# EAGLE board headstage-neuropix_via-reduce (EAGLE 8.3.2), part 1 of 2
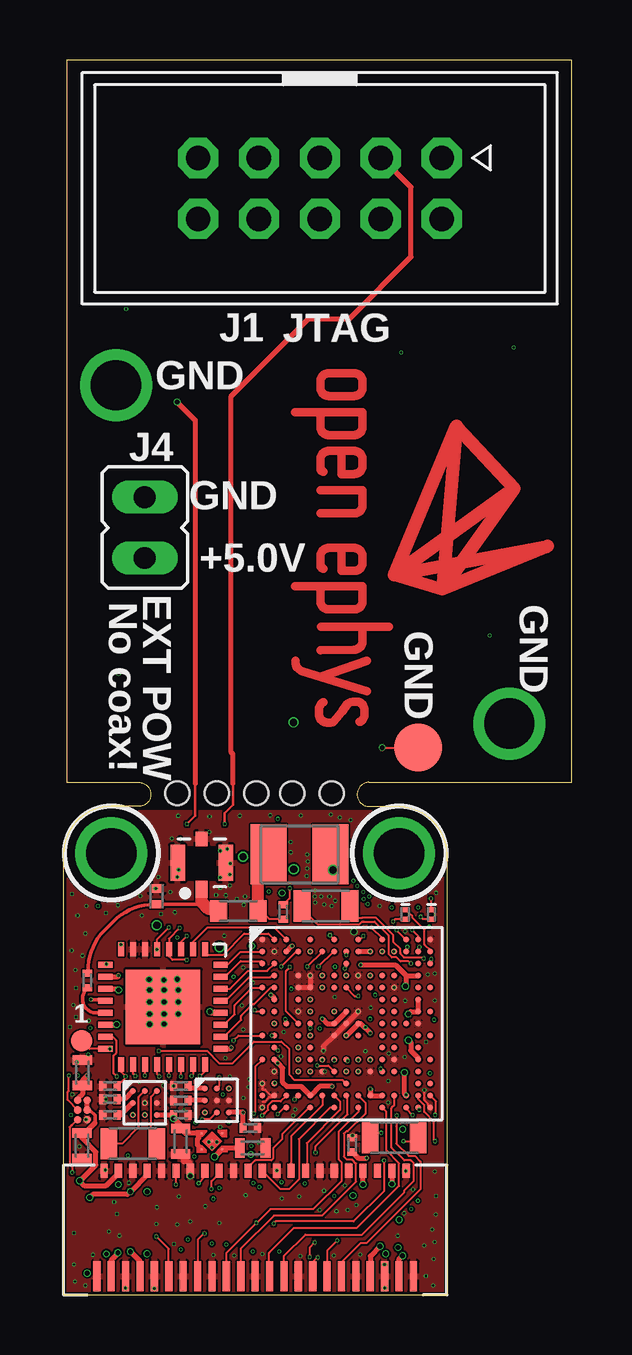
[diagram p0: board, top side]
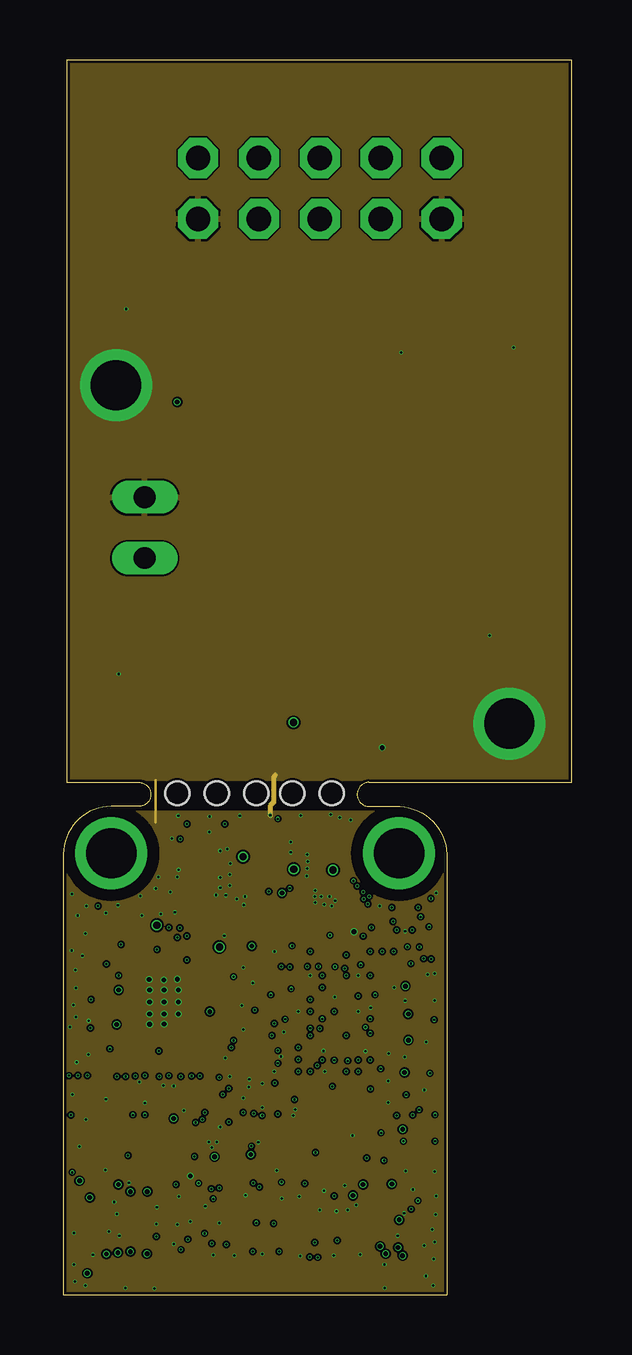
[diagram p1: board, inner layer GND1]
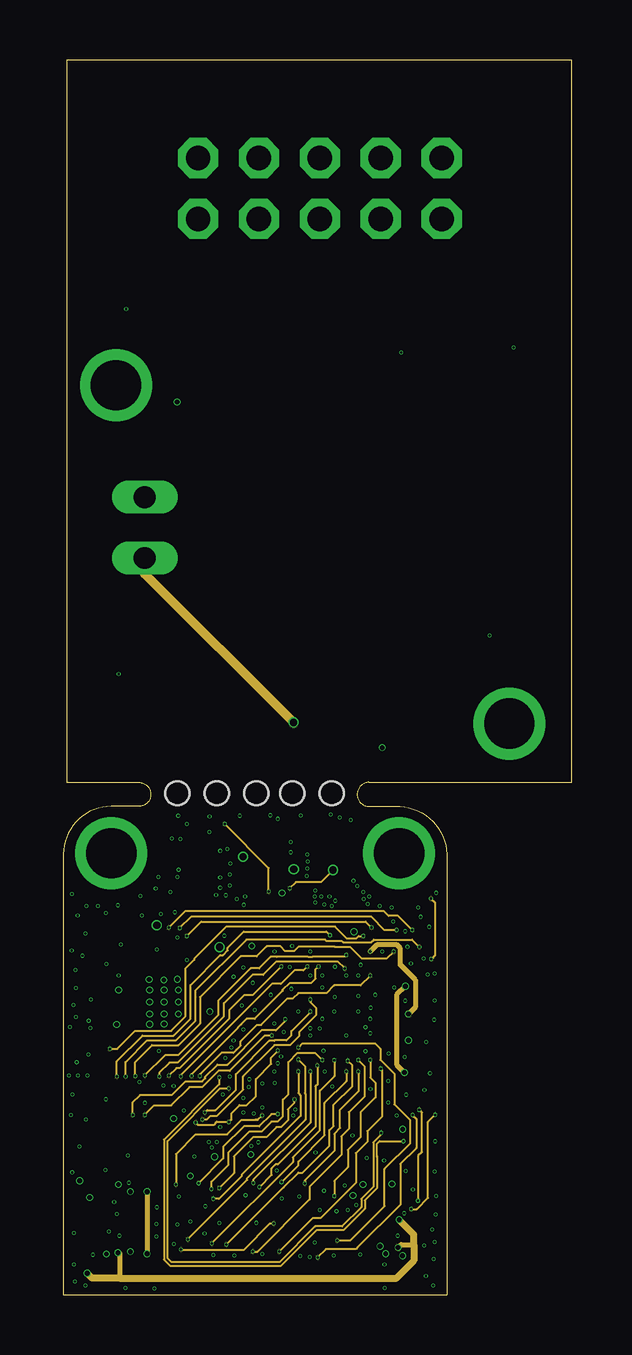
[diagram p2: board, inner layer Highspeed2]
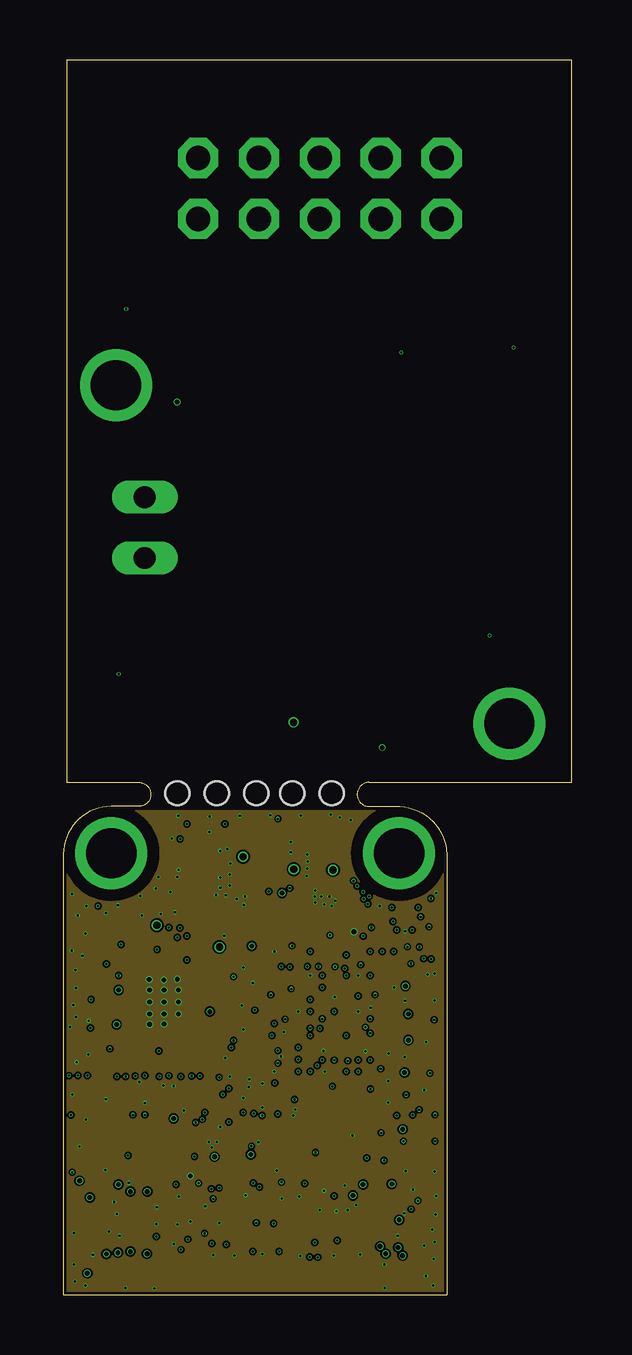
[diagram p3: board, inner layer GND2]
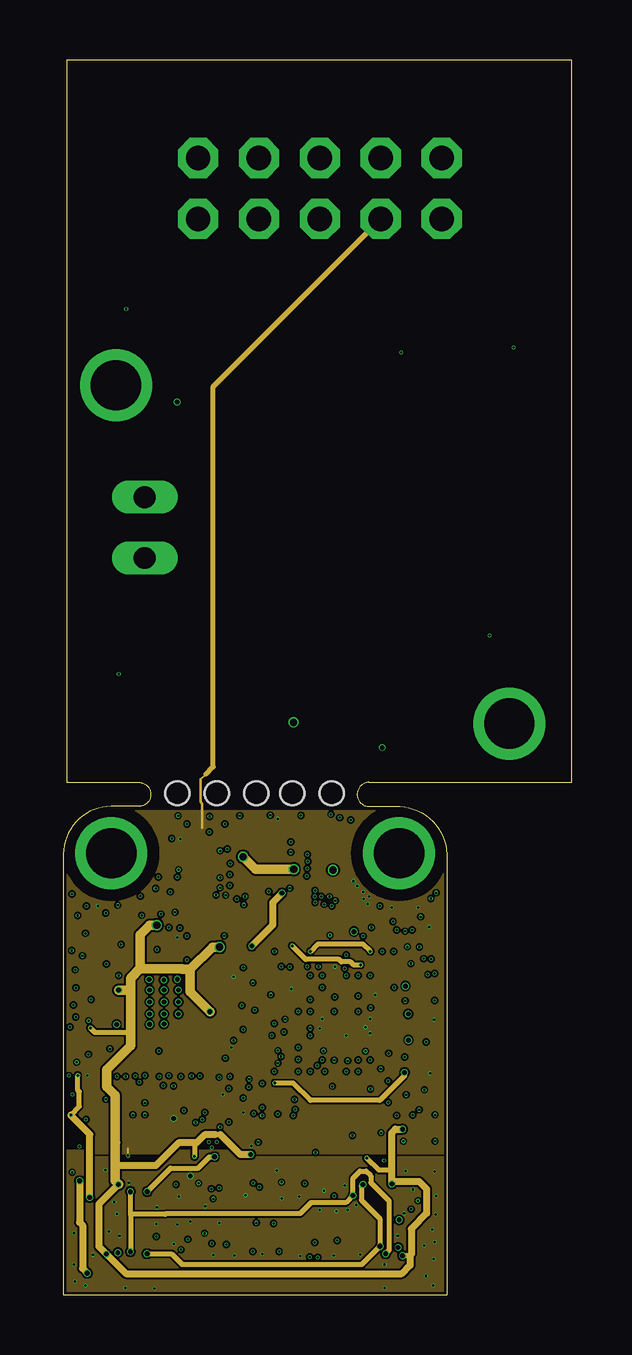
[diagram p4: board, inner layer VCC]
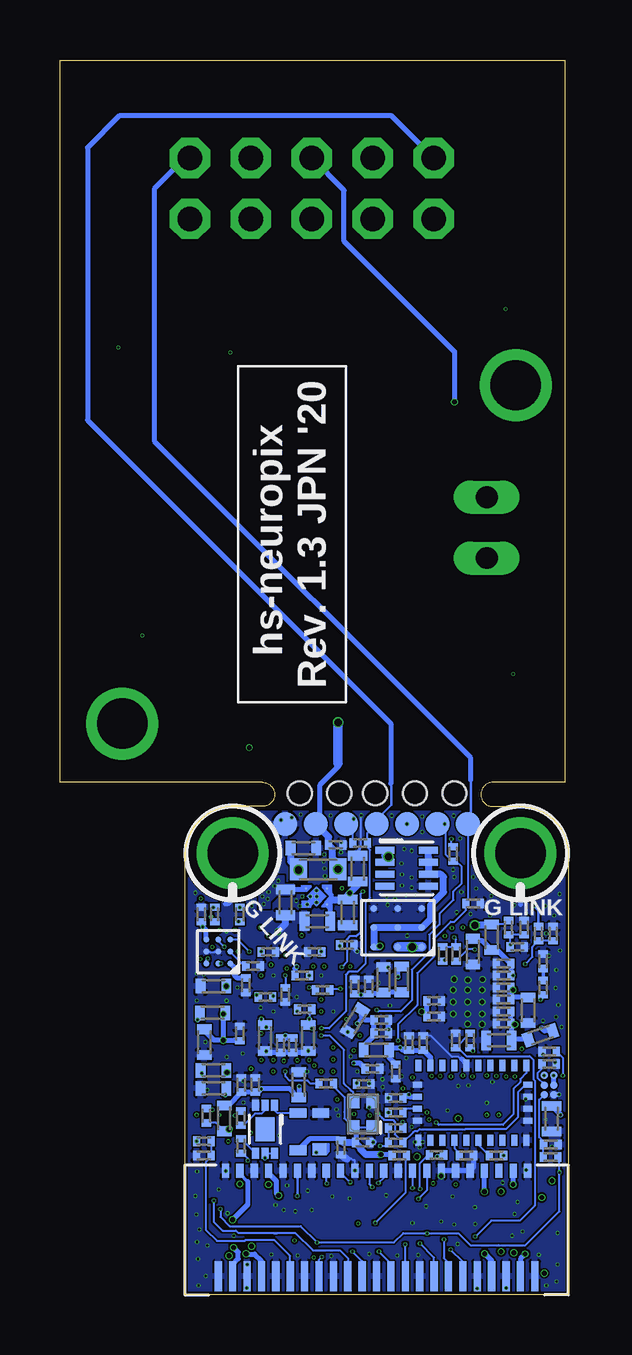
[diagram p5: board, bottom side, seen from below]

Size 21.2 x 51.45 mm. Coordinates in mm from the lower left corner, seen from the top.
Outline: 0.15,51.45 0.15,21.35 3.15,21.35 arc-90 3.65,20.85 arc-90 3.15,20.35 2,20.35 arc90 0,18.35 0,0 16,0 16,18.35 arc90 13.85,20.35 12.75,20.35 arc-90 12.25,20.85 arc-90 12.75,21.35 21.2,21.35 21.2,51.45 0.15,51.45
Copper layers (1*2*3+4*5*16): Highspeed1 0.036mm / dielectric 4mil / GND1 0.036mm / dielectric 5mil / Highspeed2 0.036mm / dielectric 0.10921875mm / GND2 0.036mm / dielectric 5mil / VCC 0.036mm / dielectric 4mil / LowSpeed 0.036mm
Design rules "speedy-6-layer-3mil-trace-space *": minimum track width 3mil, minimum drill 3mil, track to track 3mil, track to pad 3mil, pad to pad 3mil, via to via 3mil, smd to smd 2mil, copper to edge 5mil, drill to drill 5mil, minimum pad ring 2mil, minimum via ring 1mil, stop-mask expansion 0.005mm, vias tented up to drill 1mm, thermal gap 0.1mm
Net classes: 1 diff: width 0.09 mm, drill 0.2 mm, clearance 0.09 mm
Holes 1 mm at 8.05,20.9 4.75,20.9 6.4,20.9 9.55,20.9 11.2,20.9
tKeepout: area 12,16.4 to 16,20.4; area 0,16.4 to 4,20.4
bKeepout: area 11.9,16.3 to 16.1,20.5; area -0.1,16.3 to 4.1,20.5
tRestrict: area -0.1,16.3 to 4.1,20.5; area 11.9,16.3 to 16.1,20.5
bRestrict: area -0.1,16.3 to 4.1,20.5; area 11.9,16.3 to 16.1,20.5
vRestrict: area 11.9,16.3 to 16.1,20.5

## Footprints (pad centres in the part's own frame; a part is rotated, then mirrored left to right if it is on the bottom)
0201T = smd 0.3 x 0.4: 1 -0.3,0; 2 0.3,0
0402T = smd 0.4 x 0.6: 1 -0.533,0; 2 0.533,0
0402TW = smd 0.4 x 0.8: 1 -0.533,0; 2 0.533,0
LED-0201T = smd 0.2 x 0.35: 1 -0.2,0; 2 0.2,0
0402T-DFN = smd 0.35 x 0.6: A -0.325,0; C 0.325,0
0805PT-NOSILK = smd 0.7 x 1.3: A -1,0; C 1,0
2X05_IDC = drill 1.016 pad 1.676 octagon: 1 -5.08,-1.27; 2 -5.08,1.27; 3 -2.54,-1.27; 4 -2.54,1.27; 5 0,-1.27; 6 0,1.27; 7 2.54,-1.27; 8 2.54,1.27; 9 5.08,-1.27; 10 5.08,1.27
X_FL_R_SMT_1(02) = smd 0.5 x 0.7: P$1 0,-1.1 | smd 0.6 x 1.5: P$2 -1,0; P$4 1,0 | smd 0.5 x 0.6: P$3 0,1
FH23-45S-0.3SHW(05) = smd 0.3 x 1.25: 1 -6.6,0.068; 3 -6,0.068; 5 -5.4,0.068; 7 -4.8,0.068; 9 -4.2,0.068; 11 -3.6,0.068; 13 -3,0.068; 15 -2.4,0.068; 17 -1.8,0.068; 19 -1.2,0.068; 21 -0.6,0.068; 23 0,0.068; 25 0.6,0.068; 27 1.2,0.068; 29 1.8,0.068; 31 2.4,0.068; 33 3,0.068; 35 3.6,0.068; 37 4.2,0.068; 39 4.8,0.068; 41 5.4,0.068; 43 6,0.068; 45 6.6,0.068 | smd 0.3 x 0.6: 2 -6.3,4.468; 4 -5.7,4.468; 6 -5.1,4.468; 8 -4.5,4.468; 10 -3.9,4.468; 12 -3.3,4.468; 14 -2.7,4.468; 16 -2.1,4.468; 18 -1.5,4.468; 20 -0.9,4.468; 22 -0.3,4.468; 24 0.3,4.468; 26 0.9,4.468; 28 1.5,4.468; 30 2.1,4.468; 32 2.7,4.468; 34 3.3,4.468; 36 3.9,4.468; 38 4.5,4.468; 40 5.1,4.468; 42 5.7,4.468; 44 6.3,4.468
JP2 = drill 0.914 long: 1 0,0; 2 2.54,0
0603T = smd 0.7 x 0.9: 1 -0.82,0; 2 0.82,0
1210T = smd 1.5 x 2.5: 1 -1.3,0; 2 1.3,0
TP10R = smd 1 x 1: TP 0,0
TP09R = smd 0.9 x 0.9: TP 0,0
TP20R = smd 2 x 2: TP 0,0
MBGA153-8X8 = smd 0.25 x 0.25: A1 -3.5,3.5; A2 -3,3.5; A3 -2.5,3.5; A5 -1.5,3.5; A7 -0.5,3.5; A9 0.5,3.5; A11 1.5,3.5; A13 2.5,3.5; A14 3,3.5; A15 3.5,3.5; B1 -3.5,3; B2 -3,3; B3 -2.5,3; B4 -2,3; B5 -1.5,3; B6 -1,3; B7 -0.5,3; B8 0,3; B9 0.5,3; B10 1,3; B11 1.5,3; B12 2,3; B13 2.5,3; B14 3,3; B15 3.5,3; C1 -3.5,2.5; C2 -3,2.5; C8 0,2.5; C14 3,2.5; C15 3.5,2.5; D2 -3,2; D4 -2,2; D5 -1.5,2; D6 -1,2; D7 -0.5,2; D8 0,2; D9 0.5,2; D10 1,2; D11 1.5,2; D12 2,2; D14 3,2; E1 -3.5,1.5; E2 -3,1.5; E4 -2,1.5; E5 -1.5,1.5; E6 -1,1.5; E7 -0.5,1.5; E8 0,1.5; E9 0.5,1.5; E10 1,1.5; E11 1.5,1.5; E12 2,1.5; E14 3,1.5; E15 3.5,1.5; F2 -3,1; F4 -2,1; F5 -1.5,1; F11 1.5,1; F12 2,1; F14 3,1; G1 -3.5,0.5; G2 -3,0.5; G4 -2,0.5; G5 -1.5,0.5; G7 -0.5,0.5; G8 0,0.5; G9 0.5,0.5; G11 1.5,0.5; G12 2,0.5; G14 3,0.5; G15 3.5,0.5; H2 -3,0; H3 -2.5,0; H4 -2,0; H5 -1.5,0; H7 -0.5,0; H8 0,0; H9 0.5,0; H11 1.5,0; H12 2,0; H13 2.5,0; H14 3,0; J1 -3.5,-0.5; J2 -3,-0.5; J4 -2,-0.5; J5 -1.5,-0.5; J7 -0.5,-0.5; J8 0,-0.5; J9 0.5,-0.5; J11 1.5,-0.5; J12 2,-0.5; J14 3,-0.5; J15 3.5,-0.5; K2 -3,-1; K4 -2,-1; K5 -1.5,-1; K11 1.5,-1; K12 2,-1; K14 3,-1; L1 -3.5,-1.5; L2 -3,-1.5; L4 -2,-1.5; L5 -1.5,-1.5; L6 -1,-1.5; L7 -0.5,-1.5; L8 0,-1.5; L9 0.5,-1.5; L10 1,-1.5; L11 1.5,-1.5; L12 2,-1.5; L14 3,-1.5; L15 3.5,-1.5; M2 -3,-2; M4 -2,-2; M5 -1.5,-2; M6 -1,-2; M7 -0.5,-2; M8 0,-2; M9 0.5,-2; M10 1,-2; M11 1.5,-2; M12 2,-2; M14 3,-2; N1 -3.5,-2.5; N2 -3,-2.5; N8 0,-2.5; N14 3,-2.5; N15 3.5,-2.5; P1 -3.5,-3; P2 -3,-3; P3 -2.5,-3; P4 -2,-3; P5 -1.5,-3; P6 -1,-3; P7 -0.5,-3; P8 0,-3; P9 0.5,-3; P10 1,-3; P11 1.5,-3; P12 2,-3; P13 2.5,-3; P14 3,-3; P15 3.5,-3; R1 -3.5,-3.5; R2 -3,-3.5; R3 -2.5,-3.5; R5 -1.5,-3.5; R7 -0.5,-3.5; R9 0.5,-3.5; R11 1.5,-3.5; R13 2.5,-3.5; R14 3,-3.5; R15 3.5,-3.5
ASCO = smd 0.6 x 0.5: 1 -0.55,-0.4; 2 0.55,-0.4; 3 0.55,0.4; 4 -0.55,0.4
UDFN8-2X2 = smd 0.8 x 0.3: 1 -0.91,0.75; 2 -0.91,0.25; 3 -0.91,-0.25; 4 -0.91,-0.75; 5 0.91,-0.75; 6 0.91,-0.25; 7 0.91,0.25; 8 0.91,0.75
WLCSP6-1X1.2-LP = smd 0.305 x 0.305: A1 -0.2,0.4; A2 0.2,0.4; B1 -0.2,0; B2 0.2,0; C1 -0.2,-0.4; C2 0.2,-0.4
WQFN32-5X5-LP = smd 0.25 x 0.6: 1 1.75,2.4; 2 1.25,2.4; 3 0.75,2.4; 4 0.25,2.4; 5 -0.25,2.4; 6 -0.75,2.4; 7 -1.25,2.4; 8 -1.75,2.4; 17 -1.75,-2.4; 18 -1.25,-2.4; 19 -0.75,-2.4; 20 -0.25,-2.4; 21 0.25,-2.4; 22 0.75,-2.4; 23 1.25,-2.4; 24 1.75,-2.4 | smd 0.6 x 0.25: 9 -2.4,1.75; 10 -2.4,1.25; 11 -2.4,0.75; 12 -2.4,0.25; 13 -2.4,-0.25; 14 -2.4,-0.75; 15 -2.4,-1.25; 16 -2.4,-1.75; 25 2.4,-1.75; 26 2.4,-1.25; 27 2.4,-0.75; 28 2.4,-0.25; 29 2.4,0.25; 30 2.4,0.75; 31 2.4,1.25; 32 2.4,1.75 | smd 3.1 x 3.1: PAD 0,0
X2SON = smd 0.1 x 0.1: 1 -0.43,0.33; 2 -0.43,-0.33; 3 0.43,-0.33; 4 0.43,0.33 | smd 0.1 x 0.1 rotated 45: PAD 0,0
MICROSIP9-3X2.3 = smd 0.3 x 0.3: A1 -1,0.8; A2 0,0.8; A3 1,0.8; B1 -1,0; B2 0,0; B3 1,0; C1 -1,-0.8; C2 0,-0.8; C3 1,-0.8
LGA-28-3.8X2.5-LP = smd 0.25 x 0.475: 1 -2.25,1.56; 6 -2.25,-1.56; 7 -1.75,-1.56; 8 -1.25,-1.56; 9 -0.75,-1.56; 10 -0.25,-1.56; 11 0.25,-1.56; 12 0.75,-1.56; 13 1.25,-1.56; 14 1.75,-1.56; 15 2.25,-1.56; 20 2.25,1.56; 21 1.75,1.56; 22 1.25,1.56; 23 0.75,1.56; 24 0.25,1.56; 25 -0.25,1.56; 26 -0.75,1.56; 27 -1.25,1.56; 28 -1.75,1.56 | smd 0.375 x 0.25: 2 -2.3,0.75; 3 -2.3,0.25; 4 -2.3,-0.25; 5 -2.3,-0.75; 16 2.3,-0.75; 17 2.3,-0.25; 18 2.3,0.25; 19 2.3,0.75
VFLGA4-2.0X1.6 = smd 0.5 x 0.57: 1 -0.725,-0.425 | smd 0.4 x 0.7: 2 0.775,-0.475; 3 0.775,0.475; 4 -0.775,0.475
DFN6_2X1.3_PAD = smd 0.45 x 0.3: 1 -1,0.4; 2 -1,0; 3 -1,-0.4; 4 1,-0.4; 5 1,0; 6 1,0.4 | smd 1 x 0.8: PAD 0,0
WLCSP3X3 = smd 0.25 x 0.25: A1 -0.5,0.5; A2 0,0.5; A3 0.5,0.5; B1 -0.5,0; B2 0,0; B3 0.5,0; C1 -0.5,-0.5; C2 0,-0.5; C3 0.5,-0.5

## Placement (x,y rotation side)
C1  22nF  [0201T]  9.24,14.58 0 bottom
C2  22nF  [0201T]  11.5,10.4 270 bottom
C3  0.1uF  [0201T]  8.53,8.78 0 bottom
C4  0.1uF  [0201T]  12,10.4 270 bottom
C5  4.7uF  [0402T]  14.8,12.86 180 bottom
C6  4.7uF  [0402T]  12.65,10.7 270 bottom
C7  10uF  [0402T]  14.8,8.6 180 bottom
C8  10uF  [0402T]  10.85,10.7 270 bottom
C9  22nF  [0201T]  8.17,9.42 0 bottom
C10  22nF  [0201T]  13.7,10.89 90 bottom
C11  10nF  [0201T]  8.58,6.34 180 bottom
C12  22nF  [0201T]  8.32,12.85 90 bottom
C13  22nF  [0201T]  7.8,11.45 0 bottom
C14  22nF  [0201T]  13.64,8.75 90 bottom
C15  22nF  [0201T]  12.51,14.29 0 bottom
C16  0.1uF  [0201T]  8.91,12.84 90 bottom
C17  0.1uF  [0201T]  7.8,10.9 0 bottom
C18  0.1uF  [0201T]  13.05,8.75 90 bottom
C19  0.1uF  [0201T]  10.58,14.29 180 bottom
C20  10uF  [0402T]  8.9,11.42 238.2 bottom
C21  10uF  [0402T]  11.25,8.75 90 bottom
C22  10uF  [0402T]  15.18,10.53 270 bottom
C23  10uF  [0402T]  7.71,13.13 90 bottom
C24  10uF  [0402TW]  0.8,9.25 90 top
C25  1uF  [0201T]  9.7,18.75 0 bottom
C26  10uF  [0402TW]  9.2,15.93 270 bottom
C27  0.1uF  [0201T]  7.2,8.2 180 bottom
C28  10uF  [0402TW]  8.78,17.76 90 bottom
C29  0.1uF  [0201T]  6.05,10.5 90 bottom
C30  1nF  [0201T]  0.8,10.14 180 bottom
C31  0.1uF  [0201T]  5.6,12.25 0 bottom
C32  0.1uF  [0201T]  7.2,9.3 270 bottom
C33  10uF  [0402TW]  0.78,6.21 270 top
C34  10nF  [0201T]  5.6,11.6 0 bottom
C35  10nF  [0201T]  6.65,10.5 90 bottom
C36  10uF  [0402TW]  10.47,15.56 180 bottom
C37  10uF  [0402TW]  4.89,6.4 270 top
C38  1uF  [0201T]  0.73,6.26 0 bottom
C39  0.1uF  [0201T]  4.25,5.8 180 bottom
C40  10nF  [0201T]  2.7,13.8 180 bottom
C41  10nF  [0201T]  2.7,12.8 180 bottom
C42  10nF  [0201T]  2.7,11.8 180 bottom
C43  1nF  [0201T]  0.8,9.62 0 bottom
C44  0.1uF  [0201T]  2.7,13.3 180 bottom
C45  0.1uF  [0201T]  2.7,12.3 180 bottom
C46  0.1uF  [0201T]  2.7,11.3 180 bottom
C47  10uF  [0402TW]  11.8,16.35 270 bottom
C48  10uF  [0402TW]  7.9,6.12 0 top
C49  0.1uF  [0201T]  1,13.1 270 top
C50  47nF  [0201T]  1.05,12.8 270 bottom
C51  10uF  [0402TW]  0.7,7.34 270 bottom
C52  4.7uF  [0402T]  3.98,14.3 270 bottom
C53  10uF  [0402T]  1.68,11.86 270 bottom
C54  10uF  [0402TW]  2.9,10.6 180 bottom
C55  1uF  [0201T]  0.63,15.05 90 bottom
C56  10nF  [0201T]  9.48,6.13 90 bottom
C57  0.1uF  [0201T]  2.13,14.5 0 bottom
C58  10uF  [0402T]  11.05,18.61 0 bottom
C59  10nF  [0201T]  12.05,6.25 270 top
C60  1uF  [0201T]  1.95,8.15 180 top
C61  1uF  [0201T]  4.9,8.7 180 top
C62  1uF  [0201T]  13.45,12.9 270 bottom
C63  0.1uF  [0201T]  4.9,7.5 0 top
C64  0.1uF  [0201T]  7.8,6.95 0 top
C65  0.1uF  [0201T]  15.3,15.85 90 bottom
D1  XZVGR155W  [LED-0201T]  15.35,15.85 270 top
D2  XZVGR155W  [LED-0201T]  14.25,15.85 270 top
D3  SESD0402X1UN-0020-090  [0402T-DFN]  3.89,16.6 270 top
D4  VEMD1160X01  [0805PT-NOSILK]  2.9,6.3 0 top
D5  VEMD1160X01  [0805PT-NOSILK]  13.8,6.55 180 top
D6  VEMD1160X01  [0805PT-NOSILK]  10.95,16.2 0 top
J1  302-S101  [2X05_IDC]  10.7,46.1 180 top
J2  X.FL-R-SMT-1(02)  [X_FL_R_SMT_1(02)]  5.77,18 0 top
J3  FH23-45S-0.3SHW(05)  [FH23-45S-0.3SHW(05)]  8,0.7 0 top
J4  77311-118-02LF  [JP2]  3.4,30.7 90 top
J5  FH23-45S-0.3SHW(05)  [FH23-45S-0.3SHW(05)]  8,0.7 0 bottom
L1  BLM15PX601SN1D  [0402T]  14.8,9.35 0 bottom
L2  BLM15PX601SN1D  [0402T]  6.95,13.14 270 bottom
L3  BLM15PX601SN1D  [0402T]  8,10.2 180 bottom
L4  BLM15PX601SN1D  [0402T]  14.35,7.35 90 bottom
L5  BLM15PX601SN1D  [0402T]  14.84,11.75 0 bottom
L6  BLM15PX601SN1D  [0402T]  3.2,14.9 270 bottom
L7  BLM15PX601SN1D  [0402T]  1.16,10.82 198.9 bottom
L8  BLM18KG601SN1D  [0603T]  10.43,17.73 0 bottom
L9  ADL3225V-470MT-TL000  [1210T]  9.85,18.35 0 top
L10  MPZ1608S102ATA00  [0603T]  7.3,16 0 top
R1  4.7k  [0201T]  7.2,6.35 180 bottom
R2  4.7k  [0201T]  7.2,6.95 180 bottom
R3  2k  [0201T]  14.75,15.85 270 bottom
R4  4.7k  [0201T]  10.1,8.8 0 bottom
R5  10k  [0201T]  11,11.9 180 bottom
R6  2k  [0201T]  13.7,15.85 270 bottom
R7  4.7k  [0201T]  15.1,7.46 270 bottom
R8  10k  [0201T]  4.8,18.37 270 bottom
R9  1k  [0201T]  3.97,16.3 0 bottom
R10  4.7k  [0201T]  5.5,5.82 0 bottom
R11  4.7k  [0201T]  5.24,14.2 90 bottom
R12  10k  [0201T]  11.8,12.5 270 bottom
R13  10k  [0201T]  8.68,18.83 0 bottom
R14  4.7k  [0201T]  7.05,5.8 180 bottom
R15  4.7k  [0201T]  4.68,14.2 90 bottom
R16  10k  [0201T]  12.63,12.41 0 bottom
R17  10k  [0201T]  11.1,13.3 0 bottom
R18  10k  [0201T]  10.25,12.7 180 bottom
R19  10k  [0201T]  1.95,8.7 180 top
R20  10k  [0201T]  3,5.8 0 bottom
R21  6.6k  [0201T]  0.74,5.74 0 bottom
R22  10k  [0201T]  1.25,15.05 270 bottom
R23  49.9  [0201T]  1.05,13.9 270 bottom
R24  10k  [0201T]  7.2,7.6 0 bottom
R25  10k  [0201T]  2.5,15.3 270 bottom
R26  100k  [0201T]  1.85,15.3 90 bottom
R27  2k  [0201T]  9.17,15.95 90 top
R28  22  [0201T]  13.65,6.2 270 bottom
R29  20k  [0201T]  4.1,10.6 90 bottom
R30  100  [0201T]  4.7,10.6 90 bottom
R31  22  [0201T]  13.66,7.36 90 bottom
R32  15k  [0201T]  1.95,7.5 0 top
R33  15k  [0201T]  4.9,8.1 0 top
R34  15k  [0201T]  13.15,13.7 180 bottom
R35  20k  [0201T]  15.2,6.4 0 bottom
R36  100  [0201T]  15.2,5.8 180 bottom
TP1  [TP10R]  10.54,19.62 180 bottom
TP2  [TP10R]  5.46,19.62 180 bottom
TP3  [TP10R]  4.19,19.62 180 bottom
TP4  [TP10R]  8,19.62 180 bottom
TP5  [TP10R]  6.73,19.62 180 bottom
TP6  [TP10R]  9.27,19.62 180 bottom
TP7  [TP10R]  11.81,19.62 180 bottom
TP8  [TP09R]  0.76,10.58 0 top
TP9  [TP20R]  14.8,22.8 270 top
U1  10M08SAM15317G  [MBGA153-8X8]  11.8,11.3 0 top
U2  ASCO2-24.000MHZ-EK-T3  [ASCO]  8.57,7.53 90 bottom
U3  MAX4945AELA+T  [UDFN8-2X2]  6.74,17.77 0 bottom
U4  ADP7112ACBZ-1.8-R7  [WLCSP6-1X1.2-LP]  0.8,7.7 0 top
U5  DS90UB933_WQFN  [WQFN32-5X5-LP]  4.16,12 0 top
U6  NCP161BMX330  [X2SON]  10.5,16.6 0 bottom
U7  TPS8268180  [MICROSIP9-3X2.3]  7.11,15.3 180 bottom
U8  TLV70712  [X2SON]  6.2,6.4 180 top
U9  ADP7112ACBZ-1.2-R7  [WLCSP6-1X1.2-LP]  0.81,8.74 0 bottom
U10  BNO055  [LGA-28-3.8X2.5-LP]  4,8 0 bottom
U11  DSC6102MI2A-093.6000  [VFLGA4-2.0X1.6]  10.8,6.8 90 bottom
U12  PL133-27GC-R  [DFN6_2X1.3_PAD]  12.65,6.9 270 bottom
U13  TS4231  [WLCSP3X3]  3.4,8 0 top
U14  TS4231  [WLCSP3X3]  6.4,8.1 0 top
U15  TS4231  [WLCSP3X3]  14.6,14.3 180 bottom
X2  OE-LOGO_14X10  [OE-LOGO-14X10]  13.4,31.8 270 top

## Library data of the parts
C1-C59 D1-D6 J1-J5 L1-L10 R1-R36 TP1-TP9 U1-U15 X2 = jonnew
C60-C62 = jonnew; PARTNO: CL03A105MP3ZSNH
C63-C65 = jonnew; PARTNO: C0603X5R1C104K030BC

## Nets
1V2A: C51.1 J3.7 J3.8 J5.7 J5.8 U9.A2 U9.B2
1V8A: C33.1 J3.3 J3.4 J5.3 J5.4 U4.A2 U4.B2
24MHZ_P: U1.J5 U2.3
!IMU_BL: R24.2 U10.4
!IMU_RESET: R20.1 U10.11
+1V2: C48.1 J3.38 J3.39 J5.38 J5.39 U8.1
+1V8: C11.2 C31.1 C34.1 C41.1 C45.1 C53.1 C56.2 C59.2 J3.42 J3.43 J5.42 J5.43 L4.1 L6.1 L7.1 R4.2 R7.2 R10.2 R14.2 R25.1 U2.1 U2.4 U5.11 U5.28 U7.A1 U7.A2 U11.4 U12.5 U12.6
+3V3: C2.1 C4.1 C6.1 C8.1 C24.1 C27.1 C29.1 C32.1 C35.1 C37.1 C47.1 C63.1 C64.1 C65.1 J1.4 L1.1 L2.1 L3.1 L5.1 R1.2 R2.2 R3.1 R5.1 R6.1 R8.1 R11.2 R13.1 R15.2 R16.1 R17.1 R18.1 R20.2 R22.1 R24.1 TP6.TP U1.G8 U1.H7 U1.H9 U1.J8 U4.A1 U5.25 U6.1 U8.3 U8.4 U9.A1 U10.3 U10.28 U13.C3 U14.C3 U15.C3
BNO_SCL: R1.1 U1.L1 U10.19
BNO_SDA: R2.1 U1.K2 U10.20
CAL_A_1KHZ: R29.1 U1.N8
CAL_B_1KHZ: R35.1 U1.P14
CAL_SIGNAL_A: J3.11 R29.2 R30.1
CAL_SIGNAL_A1: J5.11 R35.2 R36.1
CONF_DONE: R18.2 U1.E6
CONFIG_SEL: R12.1 U1.D8
GND: C1.2 C2.2 C3.2 C4.2 C5.2 C6.2 C7.2 C8.2 C9.2 C10.2 C11.1 C12.2 C13.2 C14.2 C15.2 C16.2 C17.2 C18.2 C19.2 C20.2 C21.2 C22.2 C23.2 C24.2 C25.2 C26.2 C27.2 C28.2 C29.2 C30.2 C31.2 C32.2 C33.2 C34.2 C35.2 C36.2 C37.2 C38.2 C39.1 C40.2 C41.2 C42.2 C43.2 C44.2 C45.2 C46.2 C47.2 C48.2 C51.2 C52.2 C53.2 C54.2 C55.2 C56.1 C57.2 C58.2 C59.1 C60.2 C61.2 C62.2 C63.2 C64.2 C65.2 D3.A J1.2 J1.10 J2.P$2 J2.P$3 J2.P$4 J3.1 J3.2 J3.5 J3.6 J3.9 J3.10 J3.13 J3.14 J3.17 J3.20 J3.23 J3.26 J3.29 J3.32 J3.34 J3.36 J3.37 J3.41 J3.44 J3.45 J4.2 J5.1 J5.2 J5.5 J5.6 J5.9 J5.10 J5.13 J5.14 J5.17 J5.20 J5.23 J5.26 J5.29 J5.32 J5.34 J5.36 J5.37 J5.41 J5.44 J5.45 R9.2 R12.2 R19.2 R23.1 R26.2 R30.2 R32.1 R33.1 R34.1 R36.2 TP7.TP TP9.TP U1.A1 U1.A15 U1.B2 U1.D4 U1.D5 U1.D9 U1.E4 U1.E5 U1.E12 U1.G4 U1.G9 U1.H8 U1.H14 U1.J7 U1.L12 U1.M2 U1.M6 U1.M10 U1.N1 U1.P2 U1.R1 U1.R15 U2.2 U3.5 U4.C2 U5.6 U5.7 U5.PAD U6.2 U6.PAD U7.C1 U7.C2 U7.C3 U8.2 U8.PAD U9.C2 U10.2 U10.5 U10.6 U10.15 U10.16 U10.17 U10.18 U10.25 U11.2 U12.3 U13.B2 U13.B3 U14.B2 U14.B3 U15.B2 U15.B3
I2C_SCL_A: J3.19 R14.1 U1.R9
I2C_SCL_B: J5.19 R7.1 U1.R14
I2C_SDA_A: J3.18 R10.1 U1.L6
I2C_SDA_B: J5.18 R4.1 U1.M8
JTAGEN: R5.2 U1.G7
LH_DATA0: U1.G5 U14.C1
LH_DATA1: U1.H3 U13.C1
LH_DATA2: U1.B11 U15.C1
LH_ENV0: U1.F5 U14.C2
LH_ENV1: U1.J2 U13.C2
LH_ENV2: U1.B13 U15.C2
MIDFILT: L9.1 L10.2 R27.1
N$1: U11.3 U12.1
N$2: R28.1 U12.4
N$3: J3.35 R31.2
N$4: C13.1 C17.1 C20.1 L3.2 U1.H2
N$5: J5.35 R28.2
N$6: R31.1 U12.2
N$7: D4.C U13.A3
N$8: D4.A U13.A2
N$9: R32.2 U13.B1
N$12: C60.1 U13.A1
N$13: C58.1 L8.1 L9.2 R27.2
N$14: D5.C U14.A3
N$15: D5.A U14.A2
N$16: R33.2 U14.B1
N$26: D6.C U15.A3
N$27: D6.A U15.A2
N$28: C49.2 U5.13
N$29: R34.2 U15.B1
N$30: C55.1 R22.2 U5.9
N$31: C50.2 U5.12
N$32: C50.1 R23.2
N$33: C57.1 R25.2 R26.1 U5.8
N$34: C40.1 C44.1 C52.1 L6.2 U5.10
N$35: C42.1 C46.1 C54.1 L7.2 U5.14
N$36: C61.1 U14.A1
N$37: C62.1 U15.A1
N$38: C26.1 C28.1 C36.1 U3.6 U3.7 U3.8 U6.3 U6.4 U7.A3 U7.B1 U7.B2 U7.B3
N$39: C30.1 U4.B1
N$40: C43.1 U9.B1
N$41: C38.1 R21.1 U9.C1
N$67: C39.2 U10.9
N$92: D2.2 R6.2
N$93: D1.2 R3.2
NCONFIG: R16.2 U1.E8
NP_OSC_EN: U1.P8 U11.1
NRST: J3.15 J5.15 R21.2 U1.P15 U4.C1
NSTATUS: R17.2 U1.D6
OSC_PDOWN_N_A: J3.12 U1.P3
OSC_PDOWN_N_B: J5.12 U1.L10
PSB_CLK_A: J3.33 U1.K4
PSB_CLK_B: J5.33 U1.L4
PSB_DATA_0_A: J3.31 U1.R13
PSB_DATA_0_B: J5.31 U1.L7
PSB_DATA_1_A: J3.30 U1.P7
PSB_DATA_1_B: J5.30 U1.M4
PSB_DATA_2_A: J3.28 U1.P6
PSB_DATA_2_B: J5.28 U1.P4
PSB_DATA_3_A: J3.27 U1.P12
PSB_DATA_3_B: J5.27 U1.L8
PSB_DATA_4_A: J3.25 U1.R11
PSB_DATA_4_B: J5.25 U1.L9
PSB_DATA_5_A: J3.24 U1.R7
PSB_DATA_5_B: J5.24 U1.M5
PSB_DATA_6_A: J3.22 U1.R5
PSB_DATA_6_B: J5.22 U1.M7
PSB_SYNC_A: J3.21 U1.P9
PSB_SYNC_B: J5.21 U1.M11
REC_NRST_A: J3.16 U1.R3
REC_NRST_B: J5.16 U1.M9
SER_DIN0: U1.B8 U5.19
SER_DIN1: U1.C8 U5.20
SER_DIN2: U1.B4 U5.21
SER_DIN3: U1.B6 U5.22
SER_DIN4: U1.B7 U5.23
SER_DIN5: U1.D10 U5.24
SER_DIN6: U1.E2 U5.26
SER_DIN7: U1.E1 U5.27
SER_DIN8: U1.D2 U5.29
SER_DIN9: U1.C2 U5.30
SER_DIN10: U1.C1 U5.31
SER_DIN11: U1.B1 U5.32
SER_GPIO0: U1.A7 U5.15
SER_GPIO1: TP8.TP U1.A9 U5.16
SER_GPIO2: R19.1 U1.B14 U5.17
SER_GPIO3: U1.B12 U5.18
SER_HSYNC: U1.A2 U5.1
SER_PCLK: U1.A11 U5.3
SER_SCL: R11.1 U1.A13 U5.4
SER_SDA: R15.1 U1.A14 U5.5
SER_VSYNC: U1.A3 U5.2
SIGOUT: C49.1 D3.C J2.P$1 L10.1
STATUS_A: D1.1 U1.C15
STATUS_B: D2.1 U1.B15
TCK: J1.1 R9.1 TP3.TP U1.J1
TDI: J1.9 R13.2 TP4.TP U1.H5
TDO: J1.3 TP5.TP U1.H4
TMS: J1.5 R8.2 TP2.TP U1.G1
VCCA: C1.1 C3.1 C5.1 C7.1 L1.2 U1.B3 U1.D14 U1.N2 U1.P13
VCCIO: C10.1 C15.1 C19.1 C22.1 L5.2 U1.B5 U1.B9 U1.B10 U1.F14 U1.G14 U1.L14
VCCIO2: C9.1 C14.1 C18.1 C21.1 L4.2 U1.L2 U1.P5 U1.P10 U1.P11
VCCIOA: C12.1 C16.1 C23.1 L2.2 U1.F2
VCOAX: C25.1 J4.1 L8.2 TP1.TP U3.1 U3.2

## Tracks (layer width: path | path; a pad name or v marks a point on that pad's centre or on a via)
1V2A  (via drill 0.1, 0.2)
  Highspeed1 0.2: J3.7 3.2,1.4 v2.8,1.8 | J3.8 3.5,5 v2.8,4.3 2.68,4.18 1.23,4.18 v1.1,4.05
  VCC 0.2: 2.8,3.35 v2.8,4.3 | 2.8,3.35 v2.8,1.8 | 2.8,3.35 4.26,3.35 4.29,3.38 9.88,3.38 10.34,3.84 11.78,3.84 v12.08,4.14 12.08,4.86 12.37,5.15 12.63,5.15 12.83,4.95 12.83,4.67 13.6,3.9 13.6,1.87 v13.44,1.71 | U9.A2 0.61,8.52 0.67,8.46 0.67,7.84 v0.32,7.49
  VCC 0.3: v1.1,4.05 1.1,6.68 0.32,7.47 v0.32,7.49
  LowSpeed 0.2: v13.44,1.71 13.36,1.71 13.34,1.69 13.08,1.69 12.8,1.41 J5.7 | v12.08,4.14 12.17,4.23 12.17,4.73 12.5,5.06 J5.8 | U9.B2 U9.A2 | v0.32,7.49 C51.1
  other vias: 0.61,9.14
  pour VCC (no thermals): 2.67,4.3 arc180 2.93,4.3 arc180
  pour Highspeed1 (no thermals): 2.67,4.3 arc180 2.93,4.3 arc180
  pour Highspeed1 (no thermals): 2.67,4.3 arc180 2.93,4.3 arc180
  pour VCC (no thermals): 2.67,1.8 arc180 2.93,1.8 arc180
  pour Highspeed1 (no thermals): 2.67,1.8 arc180 2.93,1.8 arc180
  pour LowSpeed (no thermals): 13.31,1.71 arc180 13.57,1.71 arc180
  pour VCC (no thermals): 13.31,1.71 arc180 13.57,1.71 arc180
  pour VCC (no thermals): 11.95,4.14 arc180 12.21,4.14 arc180
  pour LowSpeed (no thermals): 11.95,4.14 arc180 12.21,4.14 arc180
  pour VCC (no thermals): 11.95,4.14 arc180 12.21,4.14 arc180
  pour LowSpeed (no thermals): 0.24,7.49 arc180 0.4,7.49 arc180
  pour VCC (no thermals): 0.24,7.49 arc180 0.4,7.49 arc180
  pour VCC (no thermals): 0.24,7.49 arc180 0.4,7.49 arc180
  pour Highspeed1 (no thermals): 0.98,4.05 arc180 1.23,4.05 arc180
  pour VCC (no thermals): 0.98,4.05 arc180 1.23,4.05 arc180
  pour LowSpeed (no thermals): 0.53,9.14 arc180 0.69,9.14 arc180
  pour VCC (no thermals): 0.53,9.14 arc180 0.69,9.14 arc180
1V8A  (via drill 0.2)
  Highspeed1 0.15: 1.33,7.16 1.33,7.47 1.1,7.7 U4.B2
  Highspeed1 0.2: J3.4 2.3,5.07 1.76,4.53 1.24,4.53 0.9,4.53 v0.68,4.75 0.7,4.75 1.36,5.4 1.36,5.95 0.78,6.53 C33.1 0.91,6.74 1.33,7.16 | J3.3 2,1.44 2.28,1.71 v2.28,1.76 | U4.B2 U4.A2
  Highspeed2 0.2: 2.34,0.7 2.34,1.76 v2.28,1.76 | v13.96,1.97 14.08,2.09 14.62,2.09
  Highspeed2 0.3: v1,0.9 1.2,0.7 2.34,0.7 13.9,0.7 14.62,1.42 14.62,2.09 14.62,2.51 v14,3.12
  VCC 0.3: v1,0.9 0.8,1.1 0.8,2.9 0.68,3.02 v0.68,4.75
  LowSpeed 0.15: J5.4 13.7,5.05 13.37,4.72
  LowSpeed 0.2: J5.3 14,0.94 14.01,0.94 14.01,1.25 13.77,1.5 13.77,1.78 v13.96,1.97 | v14,3.12 13.37,3.76 13.37,4.72
  pour Highspeed1 (no thermals): 0.55,4.75 arc180 0.81,4.75 arc180
  pour Highspeed1 (no thermals): 0.55,4.75 arc180 0.81,4.75 arc180
  pour VCC (no thermals): 0.55,4.75 arc180 0.81,4.75 arc180
  pour Highspeed2 (no thermals): 0.87,0.9 arc180 1.13,0.9 arc180
  pour VCC (no thermals): 0.87,0.9 arc180 1.13,0.9 arc180
  pour LowSpeed (no thermals): 13.88,3.12 arc180 14.13,3.12 arc180
  pour Highspeed2 (no thermals): 13.88,3.12 arc180 14.13,3.12 arc180
  pour Highspeed2 (no thermals): 2.15,1.76 arc180 2.4,1.76 arc180
  pour Highspeed1 (no thermals): 2.15,1.76 arc180 2.4,1.76 arc180
  pour Highspeed2 (no thermals): 13.83,1.97 arc180 14.09,1.97 arc180
  pour LowSpeed (no thermals): 13.83,1.97 arc180 14.09,1.97 arc180
24MHZ_P  (via drill 0.1)
  LowSpeed 0.076: U1.J5 9.95,10.8 9.36,10.21 9.36,8.8 9.09,8.54 9.09,8.53 8.97,8.41 U2.3
  other vias: 10.3,10.8
  pour LowSpeed (no thermals): 10.22,10.8 arc180 10.38,10.8 arc180
!IMU_BL
  LowSpeed 0.076: U10.4 6.75,7.75 R24.2
!IMU_RESET
  LowSpeed 0.076: U10.11 3.75,6.25 R20.1
+1V2  (via drill 0.2)
  Highspeed1 0.076: 6.86,6.12 6.81,6.07 U8.1
  Highspeed1 0.2: v13.21,2.02 12.8,1.61 J3.39 | v12.5,4.6 J3.38 | 6.86,6.12 C48.1 | U8.1 v6.31,5.75
  Highspeed2 0.2: v3.49,1.71 v3.5,1.72 v3.5,4.3
  VCC 0.2: v6.31,5.75 6.1,5.75 5.62,5.28 4.47,5.28 v3.5,4.3 | v12.5,4.6 12.43,4.53 12.43,3.94 13.2,3.17 v13.2,2.03 v13.21,2.02 12.45,1.26 10.47,1.26 10.46,1.27 4.95,1.27 4.51,1.71 v3.49,1.71
  LowSpeed 0.2: v3.5,4.3 J5.38 | J5.39 3.2,1.42 v3.49,1.71
  pour Highspeed1 (no thermals): 13.08,2.02 arc180 13.34,2.02 arc180
  pour VCC (no thermals): 13.08,2.02 arc180 13.34,2.02 arc180
  pour VCC (no thermals): 13.08,2.02 arc180 13.34,2.02 arc180
  pour Highspeed2 (no thermals): 3.36,1.71 arc180 3.62,1.71 arc180
  pour LowSpeed (no thermals): 3.36,1.71 arc180 3.62,1.71 arc180
  pour VCC (no thermals): 3.36,1.71 arc180 3.62,1.71 arc180
  pour LowSpeed (no thermals): 3.37,4.3 arc180 3.63,4.3 arc180
  pour VCC (no thermals): 3.37,4.3 arc180 3.63,4.3 arc180
  pour Highspeed2 (no thermals): 3.37,4.3 arc180 3.63,4.3 arc180
  pour Highspeed1 (no thermals): 12.37,4.6 arc180 12.63,4.6 arc180
  pour VCC (no thermals): 12.37,4.6 arc180 12.63,4.6 arc180
  pour Highspeed1 (no thermals): 6.18,5.75 arc180 6.44,5.75 arc180
  pour VCC (no thermals): 6.18,5.75 arc180 6.44,5.75 arc180
+1V8  (via drill 0.1, 0.2, 0.3)
  Highspeed1 0.2: U5.28 6.16,11.75 v6.11,11.8 | U5.11 2.31,12.75 v2.31,12.7 | J3.42 v13.7,4.62 | C59.2 12.3,5.7 v12.65,5.7 | J3.43 14,1.48 v14.15,1.63
  VCC 0.2: 13.7,5.19 13.16,5.19 v12.65,5.7 | 5.45,6.35 5.47,6.33 v5.47,5.76 | 6.35,6.69 6.54,6.69 6.55,6.67 | 14.46,1.62 v14.16,1.62 v14.15,1.63 | 2.78,10.6 2.81,10.57 | v1.13,11.12 1.31,10.93 2.73,10.93 2.81,11.01
  VCC 0.3: v14.15,6.9 13.85,6.9 13.7,6.75 13.7,5.19 v13.7,4.62 13.8,4.72 14.84,4.72 15.15,4.41 15.15,3.39 14.51,2.75 14.51,1.67 14.46,1.62 14.46,1.23 14.12,0.88 2.62,0.88 v1.8,1.7 1.49,2.01 1.49,3.79 v2.3,4.6 | v7.82,5.85 7.37,5.85 6.55,6.67 | 6.35,6.69 5.92,6.69 5.58,6.35 5.45,6.35 4.83,6.35 3.87,5.39 2.16,5.39 | 2.23,6.35 2.16,6.42
  VCC 0.4: 2.81,12.7 2.81,13.2 3.21,13.6 | 2.81,12.7 2.81,11.01 2.81,10.57 2.81,10.38 1.8,9.37 1.8,8.66 2.16,8.31 2.16,6.42 2.16,5.39 2.16,4.74 v2.3,4.6 | v2.31,12.7 2.81,12.7 | 3.21,13.6 3.21,15.01 3.6,15.4 v3.9,15.4 | 5.29,13.57 5.29,12.62 v6.11,11.8 | 5.29,13.57 5.3,13.58 5.31,13.58 6.22,14.49 v6.51,14.49 | 5.29,13.57 4.96,13.57 4.96,13.58 3.23,13.58 3.21,13.6
  LowSpeed 0.076: L4.1 14.69,7.16 R7.2 | R25.1 2.67,15.43 L6.1 | U2.1 8.84,6.98 U2.4 9.35,7.36 9.35,7.62 9.33,7.63 9.33,8.23 9.8,8.7 R4.2 | 8.85,6.37 C11.2 | U12.5 U12.6
  LowSpeed 0.15: 12.65,6.05 U12.5 | L4.1 14.17,6.82 14.15,6.8
  LowSpeed 0.2: 5.9,11.8 C31.1 | 5.9,11.8 C34.1 | v6.11,11.8 5.9,11.8 | v2.3,4.6 J5.42 | v7.82,5.85 7.4,5.85 R14.2 | R10.2 5.26,5.76 v5.47,5.76 | U12.5 v12.65,5.7 | v1.8,1.7 2,1.5 J5.43 | 8.85,6.86 U2.4 8.81,6.98 | C11.2 8.84,6.38 8.84,6.98 | C53.1 2.31,12.39 C45.1 | U11.4 10.8,6.5 9.55,6.5 C56.2 | L7.1 1,10.99 v1.13,11.12
  LowSpeed 0.203: C41.1 v2.31,12.7
  LowSpeed 0.3: L6.1 3.23,15.4 v3.9,15.4 | C45.1 C41.1 | L4.1 14.23,6.82 v14.15,6.9 | C56.2 9.39,6.34 C11.2 8.66,6.12 8.66,6.05 8.46,5.85 v7.82,5.85
  LowSpeed 0.4: 6.52,14.5 U7.A2 | 6.52,14.5 v6.51,14.49 | U7.A1 6.52,14.5
  pour Highspeed1 (no thermals): 5.99,11.8 arc180 6.24,11.8 arc180
  pour LowSpeed (no thermals): 5.99,11.8 arc180 6.24,11.8 arc180
  pour VCC (no thermals): 5.99,11.8 arc180 6.24,11.8 arc180
  pour Highspeed1 (no thermals): 2.18,12.7 arc180 2.43,12.7 arc180
  pour VCC (no thermals): 2.18,12.7 arc180 2.43,12.7 arc180
  pour LowSpeed (no thermals): 2.18,12.7 arc180 2.43,12.7 arc180
  pour LowSpeed (no thermals): 3.7,15.4 arc180 4.1,15.4 arc180
  pour VCC (no thermals): 3.7,15.4 arc180 4.1,15.4 arc180
  pour LowSpeed (no thermals): 1.05,11.12 arc180 1.2,11.12 arc180
  pour VCC (no thermals): 1.05,11.12 arc180 1.2,11.12 arc180
  pour LowSpeed (no thermals): 2.17,4.6 arc180 2.43,4.6 arc180
  pour VCC (no thermals): 2.17,4.6 arc180 2.43,4.6 arc180
  pour VCC (no thermals): 2.17,4.6 arc180 2.43,4.6 arc180
  pour Highspeed1 (no thermals): 13.57,4.62 arc180 13.83,4.62 arc180
  pour VCC (no thermals): 13.57,4.62 arc180 13.83,4.62 arc180
  pour VCC (no thermals): 13.57,4.62 arc180 13.83,4.62 arc180
  pour VCC (no thermals): 12.57,5.7 arc180 12.72,5.7 arc180
  pour Highspeed1 (no thermals): 12.57,5.7 arc180 12.72,5.7 arc180
  pour LowSpeed (no thermals): 12.57,5.7 arc180 12.72,5.7 arc180
  pour VCC (no thermals): 1.67,1.7 arc180 1.93,1.7 arc180
  pour VCC (no thermals): 1.67,1.7 arc180 1.93,1.7 arc180
  pour LowSpeed (no thermals): 1.67,1.7 arc180 1.93,1.7 arc180
  pour LowSpeed (no thermals): 5.4,5.76 arc180 5.55,5.76 arc180
  pour VCC (no thermals): 5.4,5.76 arc180 5.55,5.76 arc180
  pour LowSpeed (no thermals): 7.69,5.85 arc180 7.95,5.85 arc180
  pour VCC (no thermals): 7.69,5.85 arc180 7.95,5.85 arc180
  pour LowSpeed (no thermals): 7.69,5.85 arc180 7.95,5.85 arc180
  pour VCC (no thermals): 14.02,6.9 arc180 14.28,6.9 arc180
  pour LowSpeed (no thermals): 14.02,6.9 arc180 14.28,6.9 arc180
  pour LowSpeed (no thermals): 6.31,14.49 arc180 6.71,14.49 arc180
  pour VCC (no thermals): 6.31,14.49 arc180 6.71,14.49 arc180
  pour Highspeed1 (no thermals): 14.02,1.63 arc180 14.27,1.63 arc180
  pour VCC (no thermals): 14.02,1.63 arc180 14.27,1.63 arc180
+3V3  (via drill 0.1, 0.2)
  Highspeed1 0.2: U1.J8 U1.H9 12.4,11.3 v12.8,10.9 | U1.G8 U1.H7 11,11.3 v10.8,11.5 | U8.3 5.65,6.73 | U13.C3 C63.1 v4.6,7.35 4.89,7.06 C37.1 5.09,6.73 5.65,6.73 | U14.C3 R24.1 C64.1 | U5.25 6.96,10.25 v7.01,10.3 | 5.65,6.73 5.65,6.54 5.6,6.48 5.6,6.24 U8.4 | U9.A1 0.8,8.93 C24.1 0.8,8.37 0.6,8.16 U4.A1
  VCC 0.076: R20.2 2.7,6.09
  VCC 0.1: 5.95,21.7 5.72,21.47 5.72,20.54 5.79,20.47 5.79,19.45
  VCC 0.2: J1.4 6.25,37.84 6.25,22 5.95,21.7
  LowSpeed 0.076: C64.1 R1.2 7.66,6.19 v7.84,6.19 | R11.2 R15.2 4.68,14.81 v4.76,14.89 | R6.1 v13.7,16.13 | R5.1 10.8,11.8 v10.8,11.5 | R18.1 9.9,12.75 v9.5,12.75 | TP6.TP 9.27,19.56 8.98,19.27 R13.1 | R8.1 4.88,18.75 v4.88,19
  LowSpeed 0.1: v1.45,16.2 1.25,16 R22.1
  LowSpeed 0.15: 6.6,8.25 6.66,8.26
  LowSpeed 0.2: C2.1 11.75,10.7 | 11.75,10.7 C4.1 | 11.75,10.7 11.75,10.75 arc-90 U1.J8 | 6.6,8.25 U10.3 | 6.6,8.25 6.85,8.25 C27.1 | v11.33,13.67 11.4,13.6 R17.1 | TP6.TP 9.16,19.62 v8.95,19.83 | U6.1 10.98,16.88 C47.1 | U15.C3 15.1,15.18 v15.25,15.33 15.25,15.5 C65.1 | C32.1 7.47,9.87 L3.1 7.37,10.3 v7.01,10.3 6.91,10.2 C35.1 C29.1 5.75,9.9 U10.28 | v10.8,11.5 10.8,11.28 C8.1 | v12.8,11.5 12.8,11.38 C6.1 | L5.1 15.37,11.55 v15.46,11.46 | R3.1 14.78,16.15 v14.8,16.13 | v6.65,8.35 6.65,8.3 6.6,8.25 | v7.1,13.25 7.1,13.52 L2.1
  LowSpeed 0.203: R16.1 v12.99,12.51 v13,12.5 | L1.1 15.33,9.27 v15.29,9.23
  LowSpeed 0.3: C47.1 11.75,16.93
  other vias: 11.8,10.8 7.5,7.6 10.7,11.1 12.6,11.15 2.7,5.8 12.25,17.03 12.5,16.78 12.76,16.6 12.7,16.28 12.1,17.25 12.53,16.49 1.01,9.14
  pour VCC (rank 3, no thermals): 0,20.15 0,5.9 16,5.9 16.05,15.75 16,20.15
  pour LowSpeed (rank 2, no thermals): 11.45,17.1 11.45,16.65 12.2,16.65 12.45,16.4 12.45,16.1 12.9,16.1 12.9,16.65 12.08,17.47 11.85,17.47 11.85,17.1
  pour Highspeed1 (no thermals): 10.72,11.5 arc180 10.88,11.5 arc180
  pour LowSpeed (no thermals): 10.72,11.5 arc180 10.88,11.5 arc180
  pour LowSpeed (no thermals): 10.72,11.5 arc180 10.88,11.5 arc180
  pour Highspeed1 (no thermals): 12.72,10.9 arc180 12.88,10.9 arc180
  pour LowSpeed (no thermals): 12.72,11.5 arc180 12.88,11.5 arc180
  pour Highspeed1 (no thermals): 6.93,10.3 arc180 7.08,10.3 arc180
  pour LowSpeed (no thermals): 6.93,10.3 arc180 7.08,10.3 arc180
  pour LowSpeed (no thermals): 6.93,10.3 arc180 7.08,10.3 arc180
  pour LowSpeed (no thermals): 15.38,11.46 arc180 15.54,11.46 arc180
  pour LowSpeed (no thermals): 15.21,9.23 arc180 15.37,9.23 arc180
  pour LowSpeed (no thermals): 13.62,16.13 arc180 13.78,16.13 arc180
  pour LowSpeed (no thermals): 7.02,13.25 arc180 7.17,13.25 arc180
  pour LowSpeed (no thermals): 1.37,16.2 arc180 1.53,16.2 arc180
  pour Highspeed1 (no thermals): 11.72,10.8 arc180 11.88,10.8 arc180
  pour LowSpeed (no thermals): 11.72,10.8 arc180 11.88,10.8 arc180
  pour Highspeed1 (no thermals): 4.47,7.35 arc180 4.73,7.35 arc180
  pour Highspeed1 (no thermals): 4.47,7.35 arc180 4.73,7.35 arc180
  pour Highspeed1 (no thermals): 7.42,7.6 arc180 7.58,7.6 arc180
  pour Highspeed1 (no thermals): 7.42,7.6 arc180 7.58,7.6 arc180
  pour LowSpeed (no thermals): 6.57,8.35 arc180 6.73,8.35 arc180
  pour LowSpeed (no thermals): 12.92,12.5 arc180 13.08,12.5 arc180
  pour LowSpeed (no thermals): 9.42,12.75 arc180 9.58,12.75 arc180
  pour LowSpeed (no thermals): 7.77,6.19 arc180 7.92,6.19 arc180
  pour VCC (no thermals): 2.62,5.8 arc180 2.78,5.8 arc180
  pour LowSpeed (no thermals): 11.25,13.67 arc180 11.41,13.67 arc180
  pour LowSpeed (no thermals): 8.87,19.83 arc180 9.03,19.83 arc180
  pour LowSpeed (no thermals): 4.68,14.89 arc180 4.83,14.89 arc180
  pour LowSpeed (no thermals): 14.72,16.13 arc180 14.88,16.13 arc180
  pour LowSpeed (no thermals): 15.17,15.33 arc180 15.33,15.33 arc180
  pour LowSpeed (no thermals): 15.17,15.33 arc180 15.33,15.33 arc180
  pour LowSpeed (no thermals): 4.8,18.99 arc180 4.95,18.99 arc180
  pour Highspeed1 (no thermals): 0.93,9.14 arc180 1.09,9.14 arc180
BNO_SCL  (via drill 0.1)
  Highspeed1 0.076: U1.L1 8,9.5 8,7.62 v7.94,7.56
  LowSpeed 0.076: U10.19 1.8,8.75 2.1,8.45 2.1,7.4 2.6,6.9 4.3,6.9 6.21,6.9 6.3,6.81 6.42,6.81 6.45,6.78 6.47,6.78 R1.1 | v7.94,7.56 7.76,7.38 7.76,7.35 7.7,7.29 7.32,7.29 7.24,7.2 7.24,6.69 R1.1 | R1.1 6.86,6.35
  pour Highspeed1 (no thermals): 7.86,7.56 arc180 8.02,7.56 arc180
  pour LowSpeed (no thermals): 7.86,7.56 arc180 8.02,7.56 arc180
BNO_SDA  (via drill 0.1)
  Highspeed1 0.076: v8.95,10.17 8.82,10.3 U1.K2
  Highspeed2 0.076: v8.95,10.17 8.66,9.89 8.66,9.62 8.03,8.99 8.03,8.28 7.65,7.9 7.35,7.9 7,7.55 7,7.29 v6.91,7.2 6.89,7.21 6.41,7.21 | v5.52,7.18 5.6,7.09 6.29,7.09 6.36,7.16 | 6.36,7.16 6.41,7.21 | 6.41,7.21 6.36,7.16
  LowSpeed 0.076: U10.20 1.75,9.25 2.01,8.99 2.01,8.86 2.29,8.59 2.29,7.52 2.73,7.08 5.42,7.08 v5.52,7.18 | R2.1 v6.9,7.19 v6.91,7.2
  pour LowSpeed (no thermals): 5.44,7.18 arc180 5.59,7.18 arc180
  pour Highspeed2 (no thermals): 5.44,7.18 arc180 5.59,7.18 arc180
  pour Highspeed1 (no thermals): 8.87,10.17 arc180 9.03,10.17 arc180
  pour Highspeed2 (no thermals): 8.87,10.17 arc180 9.03,10.17 arc180
  pour Highspeed2 (no thermals): 6.83,7.2 arc180 6.98,7.2 arc180
  pour Highspeed2 (no thermals): 6.83,7.2 arc180 6.98,7.2 arc180
  pour LowSpeed (no thermals): 6.83,7.2 arc180 6.98,7.2 arc180
CAL_A_1KHZ  (via drill 0.1)
  Highspeed1 0.076: U1.N8 11.65,8.95 9.65,8.95 9.43,9.18 9.43,10.22 9.1,10.55 7.95,10.55 7.05,9.64 6.5,9.64 5.99,10.16 v3.98,10.16
  LowSpeed 0.076: R29.1 4.1,10.28 v3.98,10.16
  pour LowSpeed (no thermals): 3.9,10.16 arc180 4.06,10.16 arc180
  pour Highspeed1 (no thermals): 3.9,10.16 arc180 4.06,10.16 arc180
CAL_B_1KHZ  (via drill 0.1)
  Highspeed1 0.076: U1.P14 14.8,8.15 15.05,7.89 15.05,7.62 15.46,7.21 15.46,6.44 R35.1
  other vias: 15.5,6.4
  pour Highspeed1 (no thermals): 15.42,6.4 arc180 15.58,6.4 arc180
CAL_SIGNAL_A  (via drill 0.1)
  Highspeed1 0.076: 4.4,0.29 J3.11 4.4,1.91 v3.88,2.42
  LowSpeed 0.076: v3.88,2.42 3.22,3.09 2.02,3.09 1.4,3.71 1.4,8.92 1.46,8.98 1.46,9.79 1.61,9.95 4.26,9.95 4.61,10.3 R30.1 R29.2
  pour LowSpeed (no thermals): 3.81,2.42 arc180 3.96,2.42 arc180
  pour Highspeed1 (no thermals): 3.81,2.42 arc180 3.96,2.42 arc180
CAL_SIGNAL_A1
  LowSpeed 0.076: R35.2 R36.1 14.9,5.75 15.11,5.54 15.11,2.7 14.66,2.25 13.5,2.25 13.46,2.29 12.27,2.29 11.6,1.62 J5.11
CONF_DONE  (via drill 0.1)
  LowSpeed 0.076: R18.2 10.65,12.8 U1.E6
  other vias: 10.8,12.8
  pour LowSpeed (no thermals): 10.72,12.8 arc180 10.88,12.8 arc180
CONFIG_SEL  (via drill 0.1)
  Highspeed1 0.09: U1.D8
  LowSpeed 0.076: U1.D8 R12.1
  other vias: 11.8,13.3
  pour Highspeed1 (no thermals): 11.73,13.3 arc180 11.88,13.3 arc180
  pour LowSpeed (no thermals): 11.73,13.3 arc180 11.88,13.3 arc180
GND  (via drill 0.1, 0.2, 2.1 pad 3)
  Highspeed1 0.076: U1.R15 15.21,7.89 15.21,7.96 15.06,8.11 v15.06,8.54
  Highspeed1 0.09: v13.3,22.8 TP9.TP
  Highspeed1 0.1: U1.M6 v10.9,9.3 | 8.33,8.05 8.4,8.05 8.58,8.22 8.72,8.22 U1.P2 8.65,8.3 8.4,8.55 8.32,8.55 8.3,8.57 U1.N1
  Highspeed1 0.2: U1.G9 U1.H8 U1.J7 10.85,10.35 C8.2 | U1.D5 U1.E5 U1.E4 | C59.1 v12.06,6.64 | v5.3,4.95 5.3,5.46 5.22,5.54 5.03,5.54 5.03,5.77 4.99,5.77 C37.2
  GND1 0.1: 3.85,21.45 3.85,19.7
  GND1 0.2: 8.85,21.65 8.78,21.58 8.78,20.52 8.63,20.37 v8.63,19.98
  LowSpeed 0.076: U15.B3 14.96,14.3 14.94,14.28 14.76,14.28 14.74,14.3 U15.B2 | v8.63,19.98 8.66,19.95 8.66,18.64 8.67,18.63 | J5.20 8.9,5.61 8.91,5.61 8.92,5.62 8.99,5.62 9.03,5.66 9.22,5.66 | U10.25 4.51,9.82 4.51,9.85 4.58,9.91 4.85,9.91 5.74,10.8 C29.2
  LowSpeed 0.1: v10.9,9.3 11.23,9.3 C21.2
  LowSpeed 0.127: 8.67,18.63 8.69,18.61 8.69,18.57 8.78,18.48 C28.2
  LowSpeed 0.15: v0.8,14.13 0.98,14.13 R23.1
  LowSpeed 0.2: C6.2 arc-90 12.53,10.1 C4.2 C2.2 10.97,10.1 arc-90 C8.2 | C13.2 v7.5,11.05 C17.2 | 8.14,6.36 v8.13,6.36 | v2,18.4 2,16.26 | v14,18.4 14,16.5 14.22,16.28 14.3,16.28 | C1.2 8.94,14.43 v8.81,14.3 | C39.1 3.95,5.32 J5.36 J5.34 J5.32 v5.3,4.95 | U10.25 4.25,9.63 4.45,9.83 | U9.C2 v0.39,8.34 v0.39,8.35
  LowSpeed 0.3: v12.12,15.13 11.8,15.45 C47.2 | U6.PAD 10.83,16.27 U6.2 | C11.1 8.26,6.36 8.14,6.36 | 9.22,5.66 9.26,5.69 9.34,5.69 C56.1
  other vias: 3.58,13.14 4.19,13.12 4.76,13.15 4.8,12.7 4.2,12.7 3.6,12.7 3.6,12.2 3.6,11.7 4.2,12.2 4.2,11.7 3.6,11.27 4.2,11.28 12.3,11.8 4.8,12.2 4.8,11.7 12.6,10.15 13.55,8.91 12.3,13.3 14.25,12.25 14.24,9.91 7.51,13.63 8.3,8.8 8.3,7.8 7.5,8.2 10.85,10.17 9.8,11.8 9.2,10.95 6.54,7 6.95,9.1 7.75,8.98 10.3,13.3 13.8,12.8 4.6,8.7 5.03,7.68 1.78,8.15 11.73,4.56 14.28,5.16 9.88,1.61 8.3,1.7 6.26,1.66 7.13,1.63 10.7,3.54 7.6,4.15 5.3,3.05 3.9,3.65 3.85,16.93 10.5,16.85 0.36,16.7 15.48,5.14 6.94,17.51 7.53,16.25 0.45,1.27 4.52,19.01 10.17,17.76 3.97,17.41 3.22,16.61 2.27,16.23 1.77,15.91 0.92,15.06 3.27,15.81 4.07,15.86 12.82,11.96 11.32,12.41 13.57,10.06 3.17,8.86 2.12,3.86 1.91,2.64 11.98,19.78 11.53,19.88 2.34,2.46 11.86,3.54 0.92,0.39 0.49,0.55 0.45,2.57 0.68,6.18 15.12,0.78 15.44,1.49 15.38,2.72 15.52,3.34 15.48,2.2 15.05,2.06 12.38,1.68 9.11,4.02 5.93,3.69 4.82,4.09 4.76,2.93 3.88,2.95 4.17,8.72 1.06,11.42 0.52,11.57 0.53,12.79 0.5,13.54 0.35,14.35 0.6,15.8 15.48,13.39 15.49,12.26 15.13,10.53 17.77,27.47 14.09,39.27 2.62,41.08 2.31,25.87 9.08,9.93 4.66,15.94 0.56,9.69 7.44,12.05 6.76,9.86 13.55,8.01 18.77,39.47 14.58,4.39 2.24,3.36 6.94,17.05 4.46,16.79 6.96,17.97 10.2,18.05 10.15,17.45 0.96,16.2 7.58,16.6 11.2,16.2 10.5,16.35 10.76,16.6 13.2,16.2 14.25,15.15 15.55,16.75 15.2,13.35 6.09,19.28 6.72,14.96 7.74,8.66 15.55,4.11 12.21,3.74 9.84,4.09 6.54,18.5 7.23,16.49 6.84,18.57 4.81,17.71 6.77,16.65 6.37,16.66 7.91,13 7.36,19.96 6.1,19.93 6.54,17.38 4.79,19.96 1.23,1.67 0.28,11.16 3.4,8 8.9,5.18 10.87,4.34 6.4,6.36 6.07,6.36 6.2,6.13 11.1,16.59 10.88,16.27 11.28,1.63 13.41,0.29 13.95,2.46 13.39,1.27 14.21,3.4 11.39,3.48 1.76,5.2 9.48,18.87 9.48,18.44 10.18,18.35 11.16,20.02 0.42,12.07 9.67,7.72 9.59,7.47 8.8,9.3 9.91,19.97 1.05,10.02 2.74,4.67 0.95,7.3 2.59,0.28 3.8,0.27 11.34,16.42 10.49,16.59 18.6,23.8 2.2,37.9 15.42,0.38 4.61,2.11 6.5,2.99 4.76,17.41 6.54,16.96
  pour LowSpeed (rank 2): 2.6,14.1 2.6,10.3 5.7,10.3 5.7,13.6 4.1,13.6 4.1,14.1
  pour GND2 (rank 3, no thermals): 0,20.15 0,-9.6 16,-9.6 16.05,15.75 16,20.15
  pour GND1 (rank 3): -42,58.5 -42,-8 58,-8 58,58.5
  pour LowSpeed (rank 3): 0,20.15 0,-11.65 16,-11.65 16.05,15.75 16,20.15
  pour Highspeed1 (rank 3): 0,20.15 0,-7.3 16,-7.3 16.05,15.75 16,20.15
  pour VCC (rank 4): 0,-9 16,-9 16,6 0,6
  pour Highspeed1 (no thermals): 12.22,11.8 arc180 12.38,11.8 arc180
  pour LowSpeed (no thermals): 12.67,18.4 arc180 15.33,18.4 arc180
  pour Highspeed1 (no thermals): 13.17,22.8 arc180 13.43,22.8 arc180
  pour Highspeed1 (no thermals): 8.22,8.8 arc180 8.38,8.8 arc180
  pour LowSpeed (no thermals): 0.67,18.4 arc180 3.33,18.4 arc180
  pour LowSpeed (no thermals): 0.73,14.13 arc180 0.88,14.13 arc180
  pour LowSpeed (no thermals): 10.77,10.17 arc180 10.93,10.17 arc180
  pour Highspeed1 (no thermals): 10.77,10.17 arc180 10.93,10.17 arc180
  pour LowSpeed (no thermals): 7.42,11.05 arc180 7.58,11.05 arc180
  pour LowSpeed (no thermals): 7.42,11.05 arc180 7.58,11.05 arc180
  pour Highspeed1 (no thermals): 10.22,13.3 arc180 10.38,13.3 arc180
  pour LowSpeed (no thermals): 8.05,6.36 arc180 8.21,6.36 arc180
  pour Highspeed1 (no thermals): 11.98,6.64 arc180 12.14,6.64 arc180
  pour LowSpeed (no thermals): 12,15.13 arc180 12.25,15.13 arc180
  pour LowSpeed (no thermals): 8.73,14.3 arc180 8.89,14.3 arc180
  pour GND1 (no thermals): 8.55,19.98 arc180 8.71,19.98 arc180
  pour LowSpeed (no thermals): 8.55,19.98 arc180 8.71,19.98 arc180
  pour LowSpeed (no thermals): 10.82,9.3 arc180 10.98,9.3 arc180
  pour Highspeed1 (no thermals): 10.82,9.3 arc180 10.98,9.3 arc180
  pour Highspeed1 (no thermals): 14.98,8.54 arc180 15.14,8.54 arc180
  pour LowSpeed (no thermals): 5.17,4.95 arc180 5.43,4.95 arc180
  pour Highspeed1 (no thermals): 5.17,4.95 arc180 5.43,4.95 arc180
  pour LowSpeed (no thermals): 0.31,8.35 arc180 0.46,8.35 arc180
I2C_SCL_A  (via drill 0.1)
  Highspeed1 0.076: 8.05,2.98 v8.05,3 | 8.05,2.98 8.04,2.96 8.02,2.96 6.8,1.75 J3.19 | 8.05,2.98 8.63,3.56 10.41,3.56 11.61,4.76 11.61,5.51 11.48,5.64 11.48,6.8 12.3,7.62 U1.R9
  LowSpeed 0.076: R14.1 6.78,5.78 6.78,4.28 v8.05,3
  pour Highspeed1 (no thermals): 7.98,3 arc180 8.13,3 arc180
  pour LowSpeed (no thermals): 7.98,3 arc180 8.13,3 arc180
I2C_SCL_B  (via drill 0.1)
  Highspeed1 0.076: U1.R14 14.84,7.76 v14.84,7.71
  Highspeed2 0.076: v14.84,7.71 14.96,7.59 14.96,5.95 14.79,5.79 v14.79,3.93 v14.79,3.92
  LowSpeed 0.076: 9.2,1.4 J5.19 9.2,1.53 9.52,1.85 10.66,1.85 11.38,2.57 12.29,2.57 | v14.84,7.71 15.1,7.71 R7.1 | 12.29,2.57 12.12,2.57 | 12.29,2.57 13.76,2.57 13.86,2.67 14.41,2.67 14.79,3.05 v14.79,3.92
  pour Highspeed1 (no thermals): 14.76,7.71 arc180 14.92,7.71 arc180
  pour Highspeed2 (no thermals): 14.76,7.71 arc180 14.92,7.71 arc180
  pour LowSpeed (no thermals): 14.76,7.71 arc180 14.92,7.71 arc180
  pour Highspeed2 (no thermals): 14.71,3.92 arc180 14.86,3.92 arc180
  pour LowSpeed (no thermals): 14.71,3.92 arc180 14.86,3.92 arc180
I2C_SDA_A  (via drill 0.1)
  Highspeed1 0.076: 6.5,5.1 J3.18 6.5,5.06 6.18,4.74 v6.18,4.42 | U1.L6 v10.8,9.78
  Highspeed2 0.076: v6.18,4.42 6.18,4.71 6.88,5.42 6.88,5.93 7.76,6.81 8.28,6.81 8.68,7.21 8.93,7.21 9.15,7.44 9.15,8.13 9.38,8.36 9.38,9.7 9.74,10.05 10.53,10.05 v10.8,9.78
  LowSpeed 0.076: v6.18,4.42 6.2,4.44 6.2,5.48 5.86,5.82 R10.1
  pour Highspeed2 (no thermals): 6.1,4.41 arc180 6.25,4.41 arc180
  pour LowSpeed (no thermals): 6.1,4.41 arc180 6.25,4.41 arc180
  pour Highspeed1 (no thermals): 6.1,4.41 arc180 6.25,4.41 arc180
  pour Highspeed2 (no thermals): 10.72,9.78 arc180 10.88,9.78 arc180
  pour Highspeed1 (no thermals): 10.72,9.78 arc180 10.88,9.78 arc180
I2C_SDA_B  (via drill 0.1)
  Highspeed2 0.076: U1.M8 11.8,8.9 10.9,8 10.9,6.65 9.8,5.55 9.8,5.4 v9.1,4.69
  LowSpeed 0.076: 9.5,5.1 J5.18 9.5,5.09 v9.1,4.69 9.54,5.13 9.54,5.29 | R4.1 10.75,8.8 10.87,8.93 11.63,8.93 11.8,9.1 U1.M8
  other vias: 11.8,9.3
  pour LowSpeed (no thermals): 9.02,4.69 arc180 9.17,4.69 arc180
  pour LowSpeed (no thermals): 9.02,4.69 arc180 9.17,4.69 arc180
  pour Highspeed2 (no thermals): 9.02,4.69 arc180 9.17,4.69 arc180
  pour LowSpeed (no thermals): 11.72,9.3 arc180 11.88,9.3 arc180
  pour Highspeed2 (no thermals): 11.72,9.3 arc180 11.88,9.3 arc180
JTAGEN  (via drill 0.1)
  LowSpeed 0.076: R5.2 U1.G7
  other vias: 11.3,11.8
  pour LowSpeed (no thermals): 11.22,11.8 arc180 11.38,11.8 arc180
LH_DATA0  (via drill 0.1)
  Highspeed2 0.076: U14.C1 6,7.7 6.35,7.7 7.2,8.55 7.2,9.2 8.59,10.59 8.79,10.59 8.8,10.6 9.3,10.6 9.51,10.81 9.51,10.99 10.3,11.78 U1.G5
  other vias: 5.9,7.6 10.3,11.8
  pour Highspeed2 (no thermals): 5.82,7.6 arc180 5.98,7.6 arc180
  pour Highspeed2 (no thermals): 10.22,11.8 arc180 10.38,11.8 arc180
LH_DATA1  (via drill 0.1)
  Highspeed1 0.076: U1.H3 9.3,11.43 v9.25,11.48
  Highspeed2 0.076: v9.25,11.48 9.25,11.4 8.87,11.02 8.27,11.02 6.84,9.59 6.43,9.59 5.92,9.08 5.92,9.02 5.79,8.9 5.7,8.9 5.7,8.89 5.1,8.89 4.52,8.32 3.2,8.32 2.88,8 2.88,7.52 U13.C1
  other vias: 2.9,7.5
  pour Highspeed2 (no thermals): 2.82,7.5 arc180 2.98,7.5 arc180
  pour Highspeed2 (no thermals): 9.17,11.48 arc180 9.33,11.48 arc180
  pour Highspeed1 (no thermals): 9.17,11.48 arc180 9.33,11.48 arc180
LH_DATA2  (via drill 0.1)
  LowSpeed 0.076: U1.B11 13.8,14.8 U15.C1
  other vias: 13.3,14.3
  pour LowSpeed (no thermals): 13.22,14.3 arc180 13.38,14.3 arc180
LH_ENV0  (via drill 0.1)
  Highspeed1 0.076: v5.8,7.31 6.11,7.31 U14.C2
  Highspeed2 0.076: U1.F5 10.3,12.2 10.54,11.96 10.54,11.64 10.21,11.32 9.85,10.96 9.85,10.79 9.46,10.4 8.8,10.4 7.5,9.1 7.5,8.55 6.41,7.46 6.14,7.46 5.98,7.3 v5.81,7.3 v5.8,7.31
  other vias: 10.3,12.3
  pour Highspeed2 (no thermals): 5.72,7.31 arc180 5.88,7.31 arc180
  pour Highspeed1 (no thermals): 5.72,7.31 arc180 5.88,7.31 arc180
  pour Highspeed2 (no thermals): 10.22,12.3 arc180 10.38,12.3 arc180
LH_ENV1  (via drill 0.1)
  Highspeed1 0.076: U1.J2 v8.7,10.8
  Highspeed2 0.076: U13.C2 3.79,7.89 4.5,7.89 5.26,8.65 5.79,8.65 6.47,9.34 6.94,9.34 8.4,10.8 v8.7,10.8
  other vias: 3.4,7.5
  pour Highspeed2 (no thermals): 3.32,7.5 arc180 3.48,7.5 arc180
  pour Highspeed1 (no thermals): 8.62,10.8 arc180 8.78,10.8 arc180
  pour Highspeed2 (no thermals): 8.62,10.8 arc180 8.78,10.8 arc180
LH_ENV2  (via drill 0.1)
  Highspeed1 0.076: U1.B13 14.35,14.35 v14.35,14.5
  LowSpeed 0.076: U15.C2 14.6,14.75 v14.35,14.5
  pour Highspeed1 (no thermals): 14.27,14.5 arc180 14.43,14.5 arc180
  pour LowSpeed (no thermals): 14.27,14.5 arc180 14.43,14.5 arc180
MIDFILT
  Highspeed1 0.076: R27.1 8.61,15.65 8.26,16 L10.2
  Highspeed1 0.5: 8.52,17.58 8.55,17.61 8.55,17.9 | 8.55,17.9 L9.1 8.55,17.9 | 8.32,17.67 8.55,17.9 | 8.55,17.9 8.55,17.39 | L10.2 8.12,17.47 8.55,17.9
N$1
  LowSpeed 0.076: U12.1 12.25,7.7 12.12,7.58 U11.3
N$2
  LowSpeed 0.076: R28.1 U12.4
N$3  (via drill 0.1)
  Highspeed1 0.076: 11.6,0.7 J3.35 | J3.35 11.6,0.31 11.61,0.3 | J3.35 11.6,1.35 12.4,2.15 12.64,2.15 14.89,4.4 14.89,5.54 14.65,5.79 14.4,5.79 13.88,6.3 13.88,7.01 13.9,7.03 v13.9,7.47
  LowSpeed 0.076: v13.9,7.47 13.71,7.66 R31.2
  pour LowSpeed (no thermals): 13.82,7.47 arc180 13.98,7.47 arc180
  pour Highspeed1 (no thermals): 13.82,7.47 arc180 13.98,7.47 arc180
N$4  (via drill 0.1)
  LowSpeed 0.2: L3.2 8.53,10.37 8.1,10.8 C17.1 C13.1 | C13.1 8.14,11.41 | 8.62,11.6 C20.1 | 8.62,11.6 8.62,11.48 U1.H2 | C13.1 8.47,11.45 8.62,11.6
  other vias: 8.8,11.3
  pour LowSpeed (no thermals): 8.72,11.3 arc180 8.88,11.3 arc180
N$5  (via drill 0.1)
  Highspeed1 0.076: v13.37,5.59 13.37,4.32 12.11,3.06 8.86,3.06 v8.77,2.98
  Highspeed2 0.076: v8.77,2.98 8.63,2.98 7.54,1.89 v4.92,1.89 v4.91,1.88
  LowSpeed 0.076: R28.2 13.58,5.9 13.37,5.69 v13.37,5.59 | v4.91,1.88 4.4,1.37 J5.35
  pour Highspeed2 (no thermals): 4.83,1.88 arc180 4.99,1.88 arc180
  pour LowSpeed (no thermals): 4.83,1.88 arc180 4.99,1.88 arc180
  pour LowSpeed (no thermals): 13.3,5.6 arc180 13.45,5.6 arc180
  pour Highspeed1 (no thermals): 13.3,5.6 arc180 13.45,5.6 arc180
  pour Highspeed2 (no thermals): 8.7,2.97 arc180 8.85,2.97 arc180
  pour Highspeed1 (no thermals): 8.7,2.97 arc180 8.85,2.97 arc180
N$6
  LowSpeed 0.076: R31.1 13.55,7.06 13.07,7.54 12.79,7.54 12.65,7.69 U12.2
N$7
  Highspeed1 0.076: 3.7,6.7 3.7,6.6 | D4.C 3.7,6.5 3.7,6.7 | 3.7,6.7 3.7,6.75 3.66,6.79 3.66,8.26 U13.A3
N$8
  Highspeed1 0.076: D4.A 2.45,6.3 3.15,7 3.15,8.25 U13.A2
N$9
  Highspeed1 0.2: U13.B1 2.4,7.5 R32.2
N$10
  cutout GND1: 0,18.4 arc-90 2,20.4 arc-90 4,18.4 arc-90 2,16.4 arc-90
N$11
  cutout LowSpeed: 0,18.4 arc-90 2,20.4 arc-90 4,18.4 arc-90 2,16.4 arc-90
N$12
  Highspeed1 0.2: U13.A1 2.55,8.15 C60.1
N$13  (via drill 0.1, 0.3)
  Highspeed1 0.076: L9.2 11.15,17.7 v11.25,17.7 | v9.44,16.94 9.44,16.52 R27.2
  Highspeed2 0.076: v11.25,17.7 10.75,17.2 9.7,17.2 v9.44,16.94
  LowSpeed 0.3: 11.33,17.7 v11.25,17.7 L8.1 11.58,18.06 C58.1
  pour LowSpeed (no thermals): 11.05,17.7 arc180 11.45,17.7 arc180
  pour LowSpeed (no thermals): 11.05,17.7 arc180 11.45,17.7 arc180
  pour Highspeed1 (no thermals): 11.05,17.7 arc180 11.45,17.7 arc180
  pour Highspeed2 (no thermals): 11.05,17.7 arc180 11.45,17.7 arc180
  pour Highspeed2 (no thermals): 9.36,16.94 arc180 9.52,16.94 arc180
  pour Highspeed1 (no thermals): 9.36,16.94 arc180 9.52,16.94 arc180
N$14  (via drill 0.1)
  Highspeed1 0.076: D5.C 12.8,6.75 v13.25,6.75 | 6.93,8.6 U14.A3
  Highspeed2 0.076: v13.25,6.75 13.25,6.68 13.04,6.47 12.93,6.35 12.93,4.5 12.43,4 12.43,3.65 11.62,2.85 10.5,2.85 9.01,1.36 4.52,1.36 4.35,1.53 4.35,6.41 6.54,8.6 U14.A3 6.93,8.6
  other vias: 6.9,8.6
  pour Highspeed2 (no thermals): 13.17,6.75 arc180 13.33,6.75 arc180
  pour Highspeed1 (no thermals): 13.17,6.75 arc180 13.33,6.75 arc180
  pour Highspeed2 (no thermals): 6.82,8.6 arc180 6.98,8.6 arc180
  pour Highspeed2 (no thermals): 6.82,8.6 arc180 6.98,8.6 arc180
  pour Highspeed1 (no thermals): 6.82,8.6 arc180 6.98,8.6 arc180
N$15  (via drill 0.1)
  Highspeed1 0.076: 14.65,6.51 14.57,6.51 14.46,6.4 v14.18,6.4 | 14.65,6.51 14.77,6.4 | v6.5,9.06 6.5,8.7 U14.A2 | D5.A 14.65,6.55 14.65,6.51
  Highspeed2 0.076: v14.18,6.4 13.19,6.4 13.08,6.29 13.08,5.75 | v6.5,9.06 6.5,8.77 4.2,6.47 4.2,1.47 4.46,1.21 9.07,1.21 10.56,2.7 11.69,2.7 12.58,3.59 12.58,3.94 13.08,4.44 13.08,5.75 | 13.08,5.79 13.08,5.75
  pour Highspeed1 (no thermals): 14.11,6.4 arc180 14.26,6.4 arc180
  pour Highspeed2 (no thermals): 14.11,6.4 arc180 14.26,6.4 arc180
  pour Highspeed1 (no thermals): 6.42,9.06 arc180 6.58,9.06 arc180
  pour Highspeed2 (no thermals): 6.42,9.06 arc180 6.58,9.06 arc180
N$16
  Highspeed1 0.2: U14.B1 R33.2
N$17
  cutout VCC: 0,18.4 arc-90 2,20.4 arc-90 4,18.4 arc-90 2,16.4 arc-90
N$18
  cutout GND2: 0,18.4 arc-90 2,20.4 arc-90 4,18.4 arc-90 2,16.4 arc-90
N$19
  cutout Highspeed1: 0,18.4 arc-90 2,20.4 arc-90 4,18.4 arc-90 2,16.4 arc-90
N$20
  cutout GND1: 12,18.4 arc-90 14,20.4 arc-90 16,18.4 arc-90 14,16.4 arc-90
N$21
  cutout LowSpeed: 12,18.4 arc-90 14,20.4 arc-90 16,18.4 arc-90 14,16.4 arc-90
N$22
  cutout VCC: 12,18.4 arc-90 14,20.4 arc-90 16,18.4 arc-90 14,16.4 arc-90
N$23
  cutout GND2: 12,18.4 arc-90 14,20.4 arc-90 16,18.4 arc-90 14,16.4 arc-90
N$24
  cutout Highspeed1: 12,18.4 arc-90 14,20.4 arc-90 16,18.4 arc-90 14,16.4 arc-90
N$25
  cutout GND1: 2.65,21.4 2.65,20.2 13.25,20.2 13.25,21.4
N$26  (via drill 0.1)
  Highspeed1 0.076: 12.15,16.2 D6.C 11.95,15.7 12.46,15.7 13.05,15.7 13.75,15 13.75,14.71 14.05,14.41 14.05,14.25 | 14.05,14.22 14.05,14.25 | 14.05,14.25 14.05,14.21 14.2,14.06 14.97,14.06 v15.03,14.01
  LowSpeed 0.076: U15.A3 15.1,13.94 v15.03,14.01
  pour LowSpeed (no thermals): 14.95,14.01 arc180 15.11,14.01 arc180
  pour Highspeed1 (no thermals): 14.95,14.01 arc180 15.11,14.01 arc180
N$27  (via drill 0.1)
  Highspeed1 0.076: D6.A 9.95,16.1 10.6,15.45 11.54,15.45 11.55,15.44 12.35,15.44 12.46,15.55 12.52,15.55 12.98,15.55 13.56,14.97 13.56,14.2 13.7,14.06 13.9,14.06 14.06,13.9 14.4,13.9 v14.5,13.8
  LowSpeed 0.076: U15.A2 v14.5,13.8
  pour LowSpeed (no thermals): 14.42,13.8 arc180 14.57,13.8 arc180
  pour Highspeed1 (no thermals): 14.42,13.8 arc180 14.57,13.8 arc180
N$28
  Highspeed1 0.15: 1,12.78 C49.2 C49.2 arc45 0.8,12.32 arc66 1.14,11.8 1.25,11.75 U5.13
N$29
  LowSpeed 0.076: U15.B1 13.5,13.7 R34.2
N$30  (via drill 0.1)
  Highspeed1 0.076: 1.83,13.82 U5.9 v1.8,13.78
  LowSpeed 0.076: C55.1 R22.2 1.5,14.5 1.5,14.08 v1.8,13.78
  pour LowSpeed (no thermals): 1.72,13.78 arc180 1.88,13.78 arc180
  pour Highspeed1 (no thermals): 1.72,13.78 arc180 1.88,13.78 arc180
N$31  (via drill 0.1)
  Highspeed1 0.15: v1.16,12.3 1.71,12.3 U5.12
  LowSpeed 0.15: C50.2 1.05,12.41 v1.16,12.3
  pour Highspeed1 (no thermals): 1.08,12.3 arc180 1.24,12.3 arc180
  pour LowSpeed (no thermals): 1.08,12.3 arc180 1.24,12.3 arc180
N$32
  LowSpeed 0.15: C50.1 R23.2
N$33  (via drill 0.1)
  Highspeed1 0.076: U5.8 v2.41,14.6
  LowSpeed 0.076: R26.1 R25.2 2.43,14.93 C57.1 2.43,14.58 v2.41,14.6
  pour Highspeed1 (no thermals): 2.33,14.6 arc180 2.49,14.6 arc180
  pour LowSpeed (no thermals): 2.33,14.6 arc180 2.49,14.6 arc180
N$34  (via drill 0.1)
  Highspeed1 0.2: U5.10 2.26,13.25 v2.31,13.3
  LowSpeed 0.076: C44.1 v2.31,13.3
  LowSpeed 0.2: C44.1 C40.1 2.97,14.37 L6.2 3.58,14.75 3.8,14.75 3.89,14.83 C52.1
  pour Highspeed1 (no thermals): 2.23,13.3 arc180 2.38,13.3 arc180